# Altium PCB PCB1.PcbDoc (part 1 of 2)
Units mm, origin at the board's own origin, x right, y up, seen from the top; angles counter-clockwise.
Board outline 24 x 26.9 mm, 6 copper layers (Top Layer, Int1 (GND), Int2 (PWR), Int3 (Sign), Int4 (GND), Bottom Layer), stack 1.538 mm thick; 87 components, 95 nets, 449 pads, 224 vias.
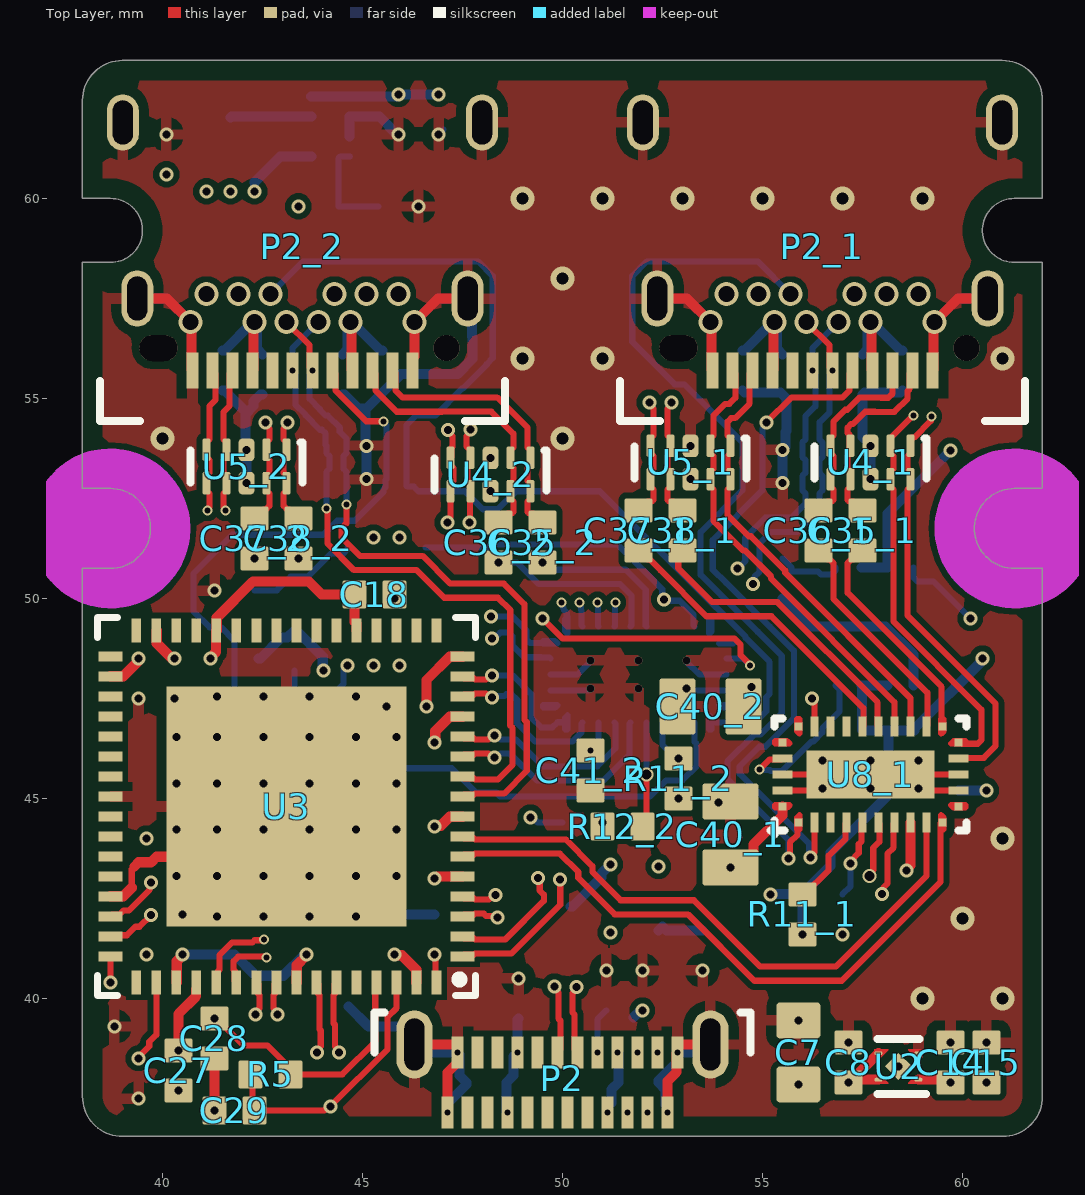
[diagram p0: Top Layer view]
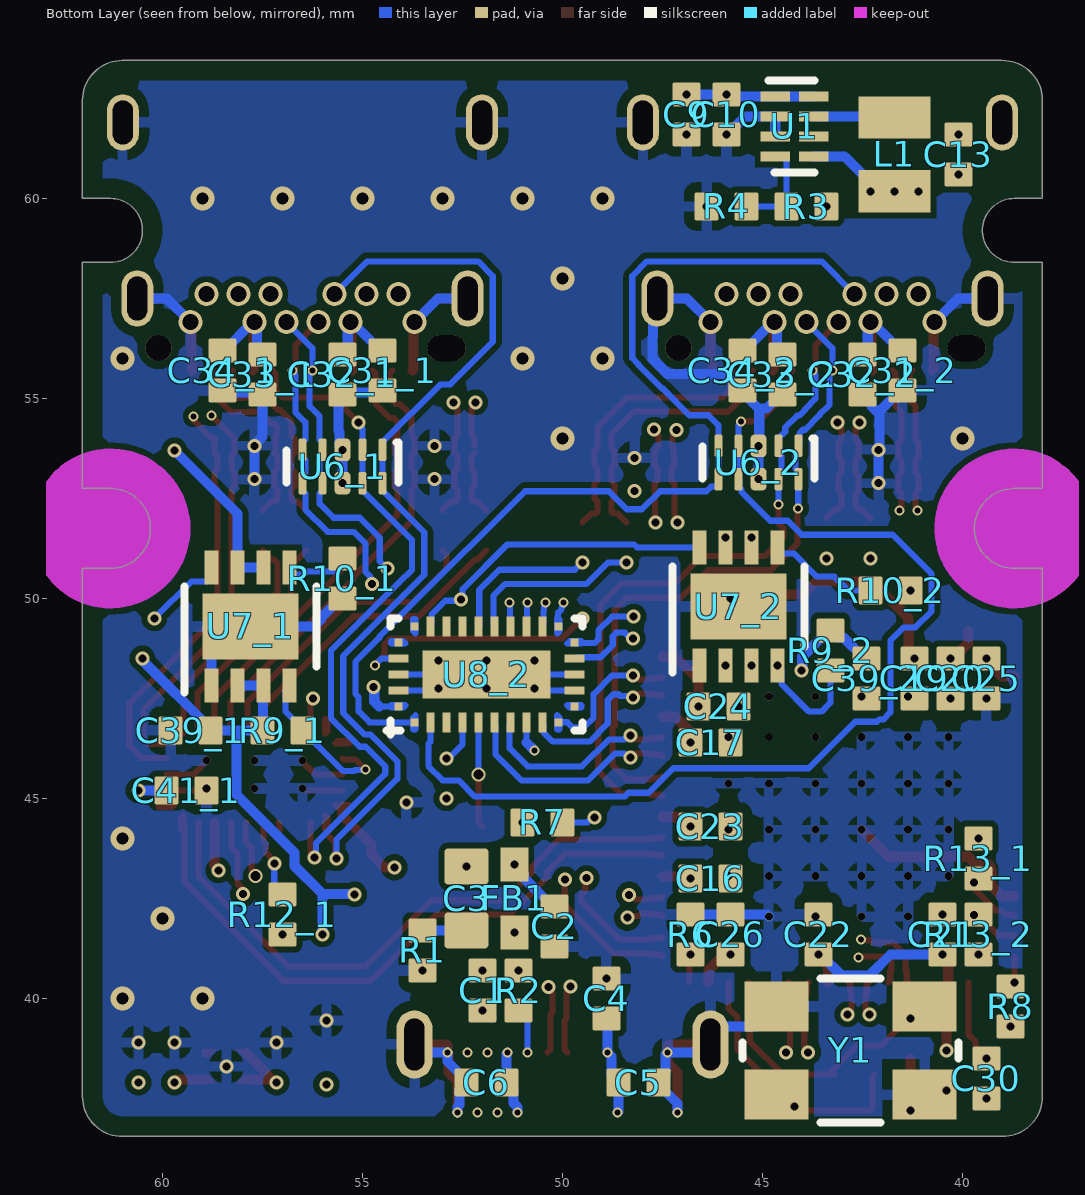
[diagram p1: Bottom Layer view, seen from below]
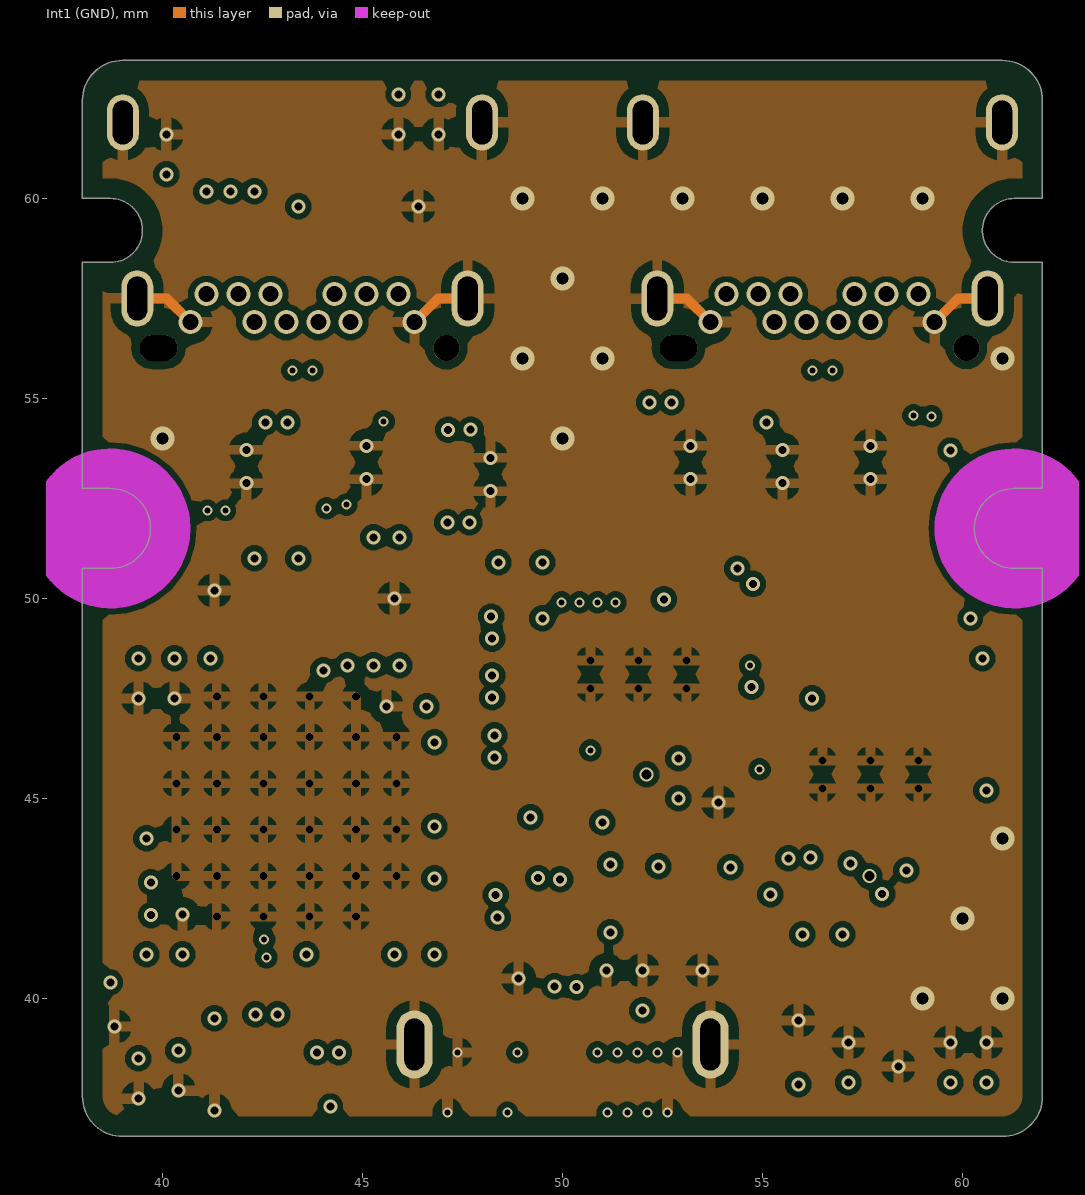
[diagram p2: Int1 (GND)]
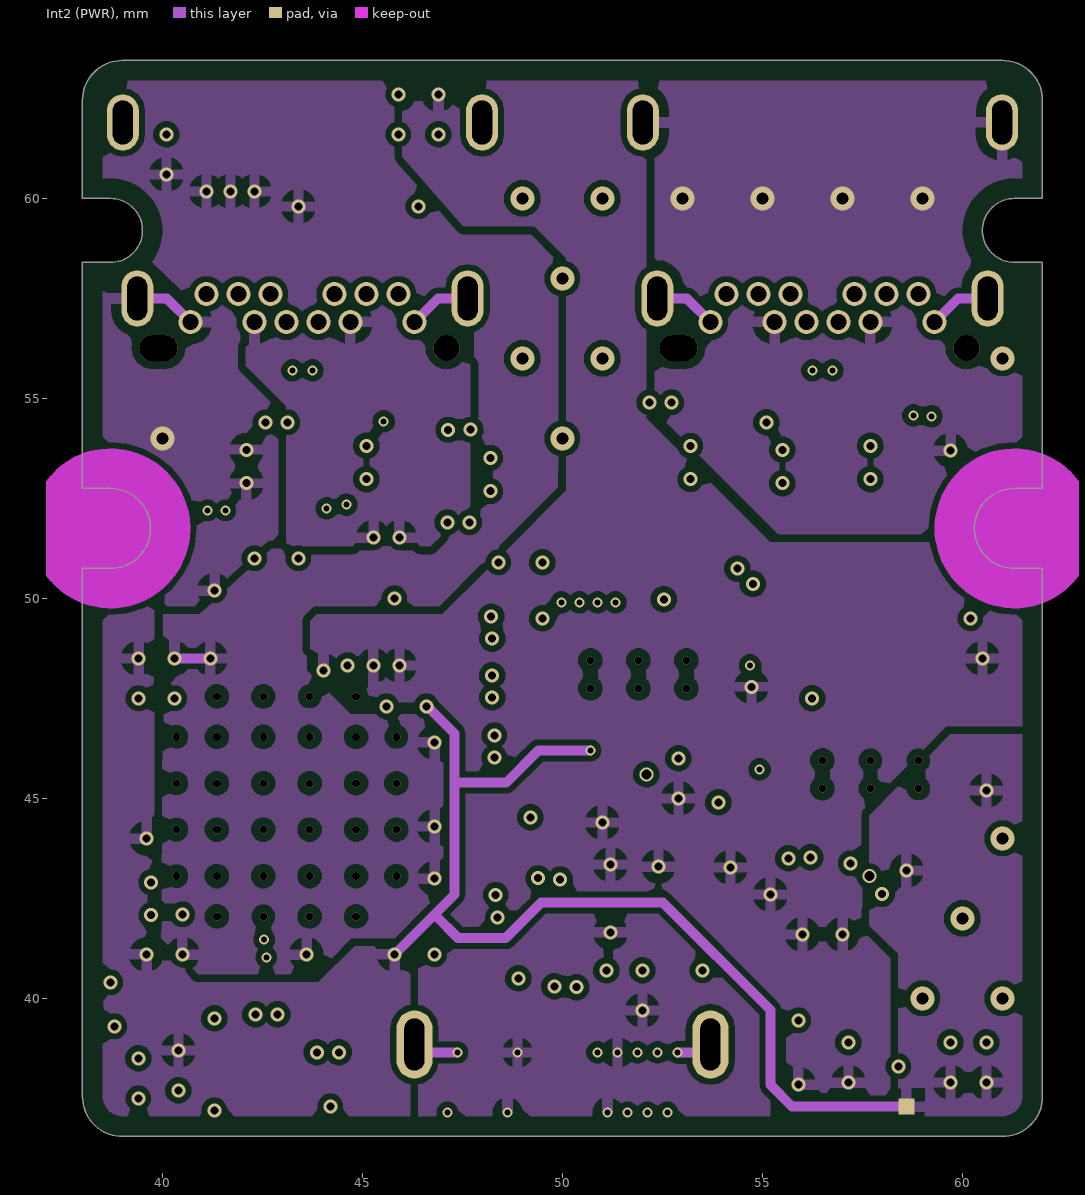
[diagram p3: Int2 (PWR)]
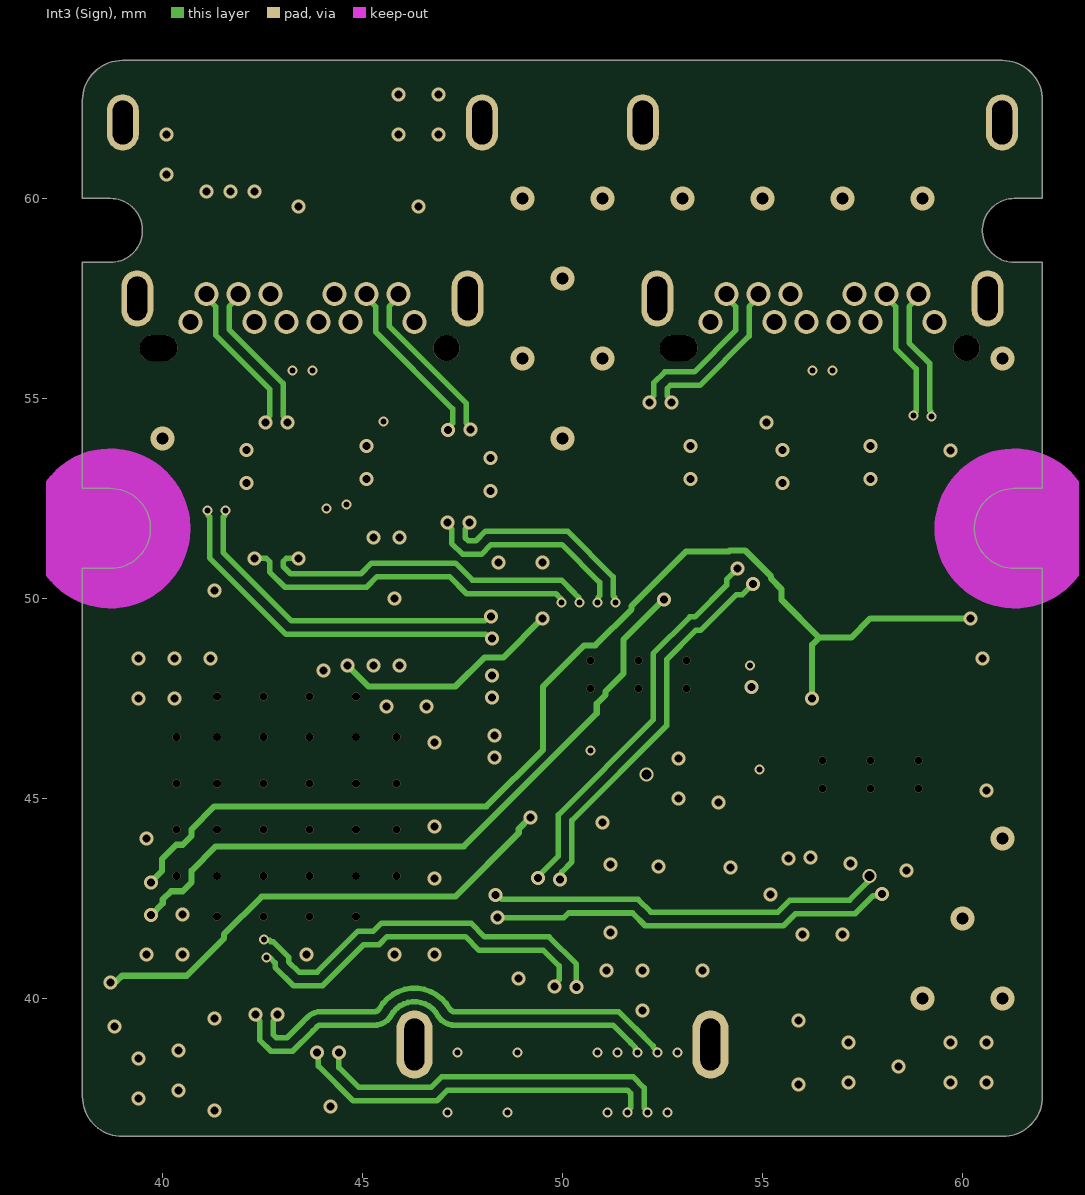
[diagram p4: Int3 (Sign)]
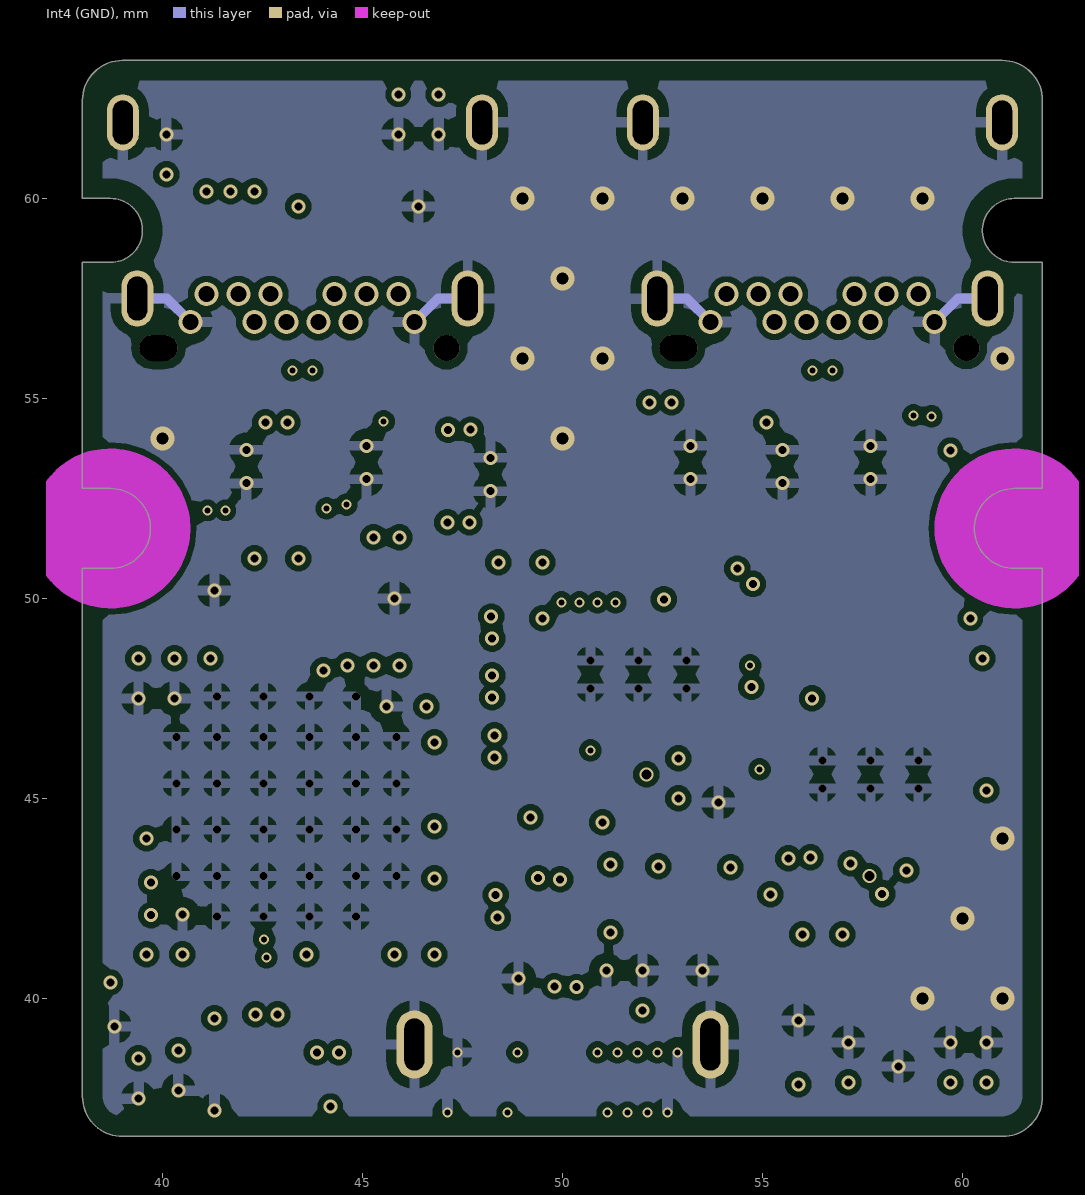
[diagram p5: Int4 (GND)]

## Layer stack, top to bottom
Top Solder: solder mask 0.0254, SM-001, Dk 4
Top Layer: signal copper 0.035
Dielectric 1: prepreg 0.0994, PP-006, Dk 4.1
Int1 (GND): signal copper 0.0152
Dielectric 3: core 0.55, Core-035, Dk 4.6
Int2 (PWR): signal copper 0.0152
Dielectric 5: prepreg 0.1088, PP-006, Dk 4.16
Int3 (Sign): signal copper 0.0152
Dielectric 6: core 0.55, Core-035, Dk 4.6
Int4 (GND): signal copper 0.0152
Dielectric 8: prepreg 0.0994, PP-006, Dk 4.1
Bottom Layer: signal copper 0.035
Bottom Solder: solder mask 0.0254, SM-001, Dk 4

## Board outline
38,50.75 38.7,50.75 ccw(c38.7,51.75) 38.7,52.75 38,52.75 38,58.4 38.7,58.4 ccw(c38.7,59.2) 38.7,60 38,60 38,62.45 cw(c39,62.45) 39,63.45 61,63.45 cw(c61,62.45) 62,62.45 62,60 61.3,60 ccw(c61.3,59.2) 61.3,58.4 62,58.4 62,52.75 61.3,52.75 ccw(c61.3,51.75) 61.3,50.75 62,50.75 62,37.55 cw(c61,37.55) 61,36.55 39,36.55 cw(c39,37.55) 38,37.55

## Design rules (kind name [scope] priority, off if disabled: settings)
BoardOutlineClearance [All] p1: gap=0.254 ignorepadtopadclearanceinfootprint=FALSE except(0: Arc-SplitContinuation Track-SplitContinuation SMDPad-SplitContinuation THPad-SplitContinuation Via-SplitContinuation Fill-SplitContinuation Poly-SplitContinuation Region-SplitContinuation Text-SplitContinuation; 0.2: Arc-OutlineEdge Track-OutlineEdge SMDPad-OutlineEdge THPad-OutlineEdge Via-OutlineEdge Text-OutlineEdge; 0.5: Fill-OutlineEdge Poly-OutlineEdge Region-OutlineEdge)
Clearance [All] p1: gap=0.15 ignorepadtopadclearanceinfootprint=FALSE except(0.2: Arc-Via Arc-Hole Track-Via Track-Hole SMDPad-THPad SMDPad-Via SMDPad-Hole THPad-Via THPad-Hole Via-Via Via-Hole Fill-Fill Fill-Poly Fill-Region Fill-Hole Poly-Poly Poly-Region Poly-Hole Region-Region Region-Hole Text-Hole; 0.254: Arc-Text Track-Text SMDPad-Text THPad-Text Via-Text Fill-Text Poly-Text Region-Text Text-Text)
DiffPairsRouting [All] p1: maxlimit=0.254 minlimit=0.2 mostfreqgap=0.254 toplayer_maxgap=0.2 toplayer_prefgap=0.2 toplayer_minwidth=0.155 toplayer_maxwidth=0.155 toplayer_prefwidth=0.155 midlayer2_maxgap=0.2 midlayer2_prefgap=0.2 midlayer2_minwidth=0.138 midlayer2_maxwidth=0.138 midlayer2_prefwidth=0.138 bottomlayer_maxgap=0.2 bottomlayer_prefgap=0.2 bottomlayer_minwidth=0.155 bottomlayer_maxwidth=0.155 bottomlayer_prefwidth=0.155 impedanceprofiledriven=TRUE impedanceprofileid={29971EB8-0806-4C52-B041-95433472F7FA} impedanceprofilevalue=90.000000 maxuncoupledlength=12.7
MatchedLengths [All] p1: tolerance=25.4 checknetsindiffpair=TRUE checkdiffpairvsdiffpair=FALSE checkxsignals=FALSE checkothers=FALSE usedelayunits=TRUE delaytolerance=8.000000
MinimumSolderMaskSliver [All] p1: minsoldermaskwidth=0.1
PolygonConnect [All] p1: connectstyle=Relief reliefconductorwidth=0.254 reliefentries=4 polygonreliefangle="90 Angle" airgapwidth=0.254
RoutingVias [All] p1: holewidth=0.2 width=0.35 viastyle="Through Hole" minholewidth=0.15 minwidth=0.25 maxholewidth=0.711 maxwidth=1.27
SilkToSolderMaskClearance [IsPad] p1: minsilkscreentomaskgap=0.15 clearancetoexposedcopper=TRUE
SolderMaskExpansion [All] p1: expansion=0.049 istentingtop=FALSE
SupplyNets "Schematic Supply Nets_9" [InNet('VBUS')] p1: voltage=0.000
SupplyNets "Schematic Supply Nets_7" [InNet('GND')] p2: voltage=0.000
SupplyNets "Schematic Supply Nets_6" [InNet('+5V')] p3: voltage=0.000
SupplyNets "Schematic Supply Nets_2" [InNet('+3.3V')] p4: voltage=0.000
SupplyNets "Schematic Supply Nets" [InNet('+1.1V')] p5: voltage=0.000
Width [All] p1: maxlimit=0.254 minlimit=0.1 preferedwidth=0.155
27 further rules are at their usual default settings.

## Classes and differential pairs
component class Downstream_Port_2: C31_2 C32_2 C33_2 C34_2 C35_2 C36_2 C37_2 C38_2 P2_2 U4_2 U5_2 U6_2
channel class Downstream_Controller: Downstream_Controller_1 Downstream_Controller_2
component class Downstream_Controller_1: C39_1 C40_1 C41_1 R9_1 R10_1 R11_1 R12_1 R13_1 U7_1 U8_1
component class Downstream_Controller_2: C39_2 C40_2 C41_2 R9_2 R10_2 R11_2 R12_2 R13_2 U7_2 U8_2
channel class Downstream_Port: Downstream_Port_1 Downstream_Port_2
component class USB_Hub: C16 C17 C18 C19 C20 C21 C22 C23 C24 C25 C26 C27 C28 C29 C30 R5 R6 R7 R8 U3 Y1
component class Upstream_Port: C1 C2 C3 C4 C5 C6 FB1 P2 R1 R2
component class Downstream_Port_1: C31_1 C32_1 C33_1 C34_1 C35_1 C36_1 C37_1 C38_1 P2_1 U4_1 U5_1 U6_1
component class Board_Power: C7 C8 C9 C10 C13 C14 C15 L1 R3 R4 U1 U2
differential pair SSTX1_2: +SSTX1_2_P -SSTX1_2_N
differential pair SSTX1_1: +SSTX1_1_P -SSTX1_1_N
differential pair SSTX2_2: +SSTX2_1_P -SSTX2_1_N
differential pair SSTX2_1: +SSTX2_2_P -SSTX2_2_N
differential pair SSTX_2: +SSTX_1_P -SSTX_1_N
differential pair SSTX_1: +SSTX_2_P -SSTX_2_N
differential pair SSRX_2: +SSRX_1_P -SSRX_1_N
differential pair SSRX_1: +SSRX_2_P -SSRX_2_N
differential pair CTX1: +CTX1_P -CTX1_N
differential pair CRX1: +CRX1_P -CRX1_N
differential pair CTX1_2: +CTX1_1_P -CTX1_1_N
differential pair CTX1_1: +CTX1_2_P -CTX1_2_N
differential pair CRX2_2: +CRX2_1_P -CRX2_1_N
differential pair CRX2_1: +CRX2_2_P -CRX2_2_N
differential pair D_2: +D_1_P -D_1_N
differential pair D_1: +D_2_P -D_2_N
differential pair D: +D_P -D_N
differential pair CTX2_2: +CTX2_1_P -CTX2_1_N
differential pair CTX2_1: +CTX2_2_P -CTX2_2_N
differential pair CRX1_2: +CRX1_1_P -CRX1_1_N
differential pair CRX1_1: +CRX1_2_P -CRX1_2_N

## Components (designator, comment, footprint, x,y, rotation, side; value= is the part's Value field where it differs from the comment)
C1 "CC0402KRX7R9BB103" CAP0402 52,40.2 r270 bottom value=10nF
C2 "GRM155R61H105KE05D" CAP0402 50.2,41.8 r90 bottom value=1µF
C3 "GRM188R61E475KE11D" CAP0603 52.4,42.5 r90 bottom value=4.7µF
C4 "CC0402KRX7R9BB103" CAP0402 48.9,40 r270 bottom value=10nF
C5 "CC0402KRX7R9BB103" CAP0402 48.1,37.9 r0 bottom value=10nF
C6 "CC0402KRX7R9BB103" CAP0402 51.9,37.9 r180 bottom value=10nF
C7 "GRT21BR61H475KE13L" CAP0603 55.9,38.65 r270 top value=4.7µF
C8 "CC0402KRX5R9BB104" CAP0402 57.15,38.4 r270 top value=0.1µF
C9 "GRM1555C1H221JA01D" CAP0402 46.9,62.1 r90 bottom value=10µF
C10 "CC0402KRX5R9BB104" CAP0402 45.9,62.1 r90 bottom value=0.1µF
C13 "CL05A106MQ5NUNC" CAP0402 40.1,61.1 r270 bottom value=10µF
C14 "CC0402KRX5R9BB104" CAP0402 59.7,38.4 r270 top value=0.1µF
C15 "CL05A106MQ5NUNC" CAP0402 60.6,38.4 r270 top value=10µF
C16 "CC0402KRX5R9BB104" CAP0402 46.3,43 r0 bottom value=0.1µF
C17 "CC0402KRX5R9BB104" CAP0402 46.3,46.4 r0 bottom value=0.1µF
C18 "CC0402KRX5R9BB104" CAP0402 45.3,50.1 r180 top value=0.1µF
C19 "CC0402KRX5R9BB104" CAP0402 41.2,48 r90 bottom value=0.1µF
C20 "CC0402KRX5R9BB104" CAP0402 40.3,48 r90 bottom value=0.1µF
C21 "CC0402KRX5R9BB104" CAP0402 40.5,41.6 r270 bottom value=0.1µF
C22 "CC0402KRX5R9BB104" CAP0402 43.6,41.6 r270 bottom value=0.1µF
C23 "CC0402KRX5R9BB104" CAP0402 46.3,44.3 r0 bottom value=0.1µF
C24 "CC0402KRX5R9BB104" CAP0402 46.1,47.3 r0 bottom value=0.1µF
C25 "CC0402KRX5R9BB104" CAP0402 39.4,48 r90 bottom value=0.1µF
C26 "CC0402KRX5R9BB104" CAP0402 45.8,41.6 r270 bottom value=0.1µF
C27 "CC0402KRX5R9BB104" CAP0402 40.4,38.2 r90 top value=0.1µF
C28 "GJM1555C1H180FB01D" CAP0402 41.3,39 r90 top value=18pF
C29 "GJM1555C1H180FB01D" CAP0402 41.8,37.2 r0 top value=18pF
C30 "GRM155R61H105KE05D" CAP0402 39.4,38 r90 bottom value=1µF
C31_1 "CC0402KRX7R9BB103" CAP0402 54.5,55.7 r90 bottom value=10nF (schematic designator C31)
C31_2 "CC0402KRX7R9BB103" CAP0402 41.5,55.7 r90 bottom value=10nF (schematic designator C31)
C32_1 "CC0402KRX7R9BB103" CAP0402 55.5,55.6 r90 bottom value=10nF (schematic designator C32)
C32_2 "CC0402KRX7R9BB103" CAP0402 42.5,55.6 r90 bottom value=10nF (schematic designator C32)
C33_1 "CC0402KRX7R9BB103" CAP0402 57.5,55.6 r90 bottom value=10nF (schematic designator C33)
C33_2 "CC0402KRX7R9BB103" CAP0402 44.5,55.6 r90 bottom value=10nF (schematic designator C33)
C34_1 "CC0402KRX7R9BB103" CAP0402 58.5,55.7 r90 bottom value=10nF (schematic designator C34)
C34_2 "CC0402KRX7R9BB103" CAP0402 45.5,55.7 r90 bottom value=10nF (schematic designator C34)
C35_1 "UMK105BJ224KV-F" CAP0402 57.5,51.7 r90 top value=0.22µF (schematic designator C35)
C35_2 "UMK105BJ224KV-F" CAP0402 49.5,51.4 r90 top value=0.22µF (schematic designator C35)
C36_1 "UMK105BJ224KV-F" CAP0402 56.4,51.7 r90 top value=0.22µF (schematic designator C36)
C36_2 "UMK105BJ224KV-F" CAP0402 48.4,51.4 r90 top value=0.22µF (schematic designator C36)
C37_1 "UMK105BJ224KV-F" CAP0402 51.9,51.7 r90 top value=0.22µF (schematic designator C37)
C37_2 "UMK105BJ224KV-F" CAP0402 42.3,51.5 r90 top value=0.22µF (schematic designator C37)
C38_1 "UMK105BJ224KV-F" CAP0402 53,51.7 r90 top value=0.22µF (schematic designator C38)
C38_2 "UMK105BJ224KV-F" CAP0402 43.4,51.5 r90 top value=0.22µF (schematic designator C38)
C39_1 "CC0402KRX5R9BB104" CAP0402 59.3,46.7 r180 bottom value=0.1µF (schematic designator C39)
C39_2 "CC0402KRX5R9BB104" CAP0402 42.4,48 r90 bottom value=0.1µF (schematic designator C39)
C40_1 "CL21A226MAYNNNE" CAP0805 54.2,44.1 r270 top value=22µF (schematic designator C40)
C40_2 "CL21A226MAYNNNE" CAP0805 53.7,47.3 r0 top value=22µF (schematic designator C40)
C41_1 "CC0402KRX5R9BB104" CAP0402 59.4,45.2 r0 bottom value=0.1µF (schematic designator C41)
C41_2 "CC0402KRX5R9BB104" CAP0402 50.7,45.7 r90 top value=0.1µF (schematic designator C41)
FB1 "BLM18SG260TN1D" BLM18SG260TN1D 51.2,42.5 r270 bottom value=26Ω
L1 "CIGT201610EHR47MNE" IND0806 41.7,61.1 r270 bottom value=0.47µH
P2 "USB4155-03-C" USB4155-03-C 50,36.55 r0 top (schematic designator P1)
P2_1 "USB4056-03-A" USB4056-03-A 56.5,63.45 r180 top (schematic designator P2)
P2_2 "USB4056-03-A" USB4056-03-A 43.5,63.45 r180 top (schematic designator P2)
R1 "ESR10EZPJ3R3" RES0402 53.5,41.2 r90 bottom value=3.3Ω
R2 "RC0402FR-075K1L" RES0402 51.1,40.2 r270 bottom value=5.1kΩ
R3 "RC0402FR-0790K9L" RES0402 43.9,59.8 r180 bottom value=240kΩ
R4 "ERJ-2RKF3002X" RES0402 45.9,59.8 r180 bottom value=200kΩ
R5 "RC0402FR-071ML" RES0402 42.7,38.1 r180 top value=1MΩ
R6 "CRCW04029K53FKED" RES0402 46.8,41.6 r270 bottom value=9.53kΩ
R7 "RC0402FR-0790K9L" RES0402 50.5,44.4 r0 bottom value=90.9kΩ
R8 "RC0402FR-0710KL" RES0402 38.8,39.8 r90 bottom value=10kΩ
R9_1 "ERJ-2RKF1003X" RES0402 57,46.7 r0 bottom value=100kΩ (schematic designator R9)
R9_2 "ERJ-2RKF1003X" RES0402 43.3,48.7 r90 bottom value=100kΩ (schematic designator R9)
R10_1 "ERJ-2RKF1003X" RES0402 55.5,50.5 r90 bottom value=100kΩ (schematic designator R10)
R10_2 "ERJ-2RKF1003X" RES0402 41.8,50.2 r0 bottom value=100kΩ (schematic designator R10)
R11_1 "ERJ-2RKF1003X" RES0402 56,42.1 r270 top value=100kΩ (schematic designator R11)
R11_2 "ERJ-2RKF1003X" RES0402 52.9,45.5 r270 top value=100kΩ (schematic designator R11)
R12_1 "RMCF0402FT887K" RES0402 57,42.1 r270 bottom value=887kΩ (schematic designator R12)
R12_2 "RMCF0402FT887K" RES0402 51.5,44.3 r180 top value=887kΩ (schematic designator R12)
R13_1 "ERJ-2RKF1003X" RES0402 39.6,43.5 r90 bottom value=100kΩ (schematic designator R13)
R13_2 "ERJ-2RKF1003X" RES0402 39.6,41.6 r270 bottom value=100kΩ (schematic designator R13)
U1 "TPS628302ARZER" WQFN-HR8_RZE_TEX 44.2,61.8 r180 bottom
U2 "TPS7A2033PDQNR" 4-X2SON 58.4,38.3 r180 top
U3 "TUSB8044AIRGCR" RGC0064G 43.1,44.8 r180 top
U4_1 "TPD4E05U06QDQARQ1" 10-UFDFN 57.7,53.4 r270 top (schematic designator U4)
U4_2 "TPD4E05U06QDQARQ1" 10-UFDFN 48.2,53.1 r270 top (schematic designator U4)
U5_1 "TPD4E05U06QDQARQ1" 10-UFDFN 53.2,53.4 r270 top (schematic designator U5)
U5_2 "TPD4E05U06QDQARQ1" 10-UFDFN 42.1,53.3 r270 top (schematic designator U5)
U6_1 "TPD4E05U06QDQARQ1" 10-UFDFN 55.5,53.3 r270 bottom (schematic designator U6)
U6_2 "TPD4E05U06QDQARQ1" 10-UFDFN 45.1,53.4 r270 bottom (schematic designator U6)
U7_1 "TPS2556" "8-SON (3x3)" 57.8,49.3 r90 bottom (schematic designator U7)
U7_2 "TPS2556" "8-SON (3x3)" 45.6,49.8 r90 bottom (schematic designator U7)
U8_1 "HD3SS3220IRNHT" "30-WFQFN Exposed Pad" 57.7,45.6 r90 top (schematic designator U8)
U8_2 "HD3SS3220IRNHT" "30-WFQFN Exposed Pad" 51.9,48.1 r90 bottom (schematic designator U8)
Y1 "ECS-240-20-30B-TR" ECS-240-20-30B-TR 42.8,38.7 r180 bottom value="24 MHz"

## Footprints (in the part's own frame and the unit in brackets; to place one, negate y for a bottom-side part, rotate by r counter-clockwise, add the part's x,y. Pads: shape width x height; smd on the part's side, far side on the other; paste and mask are expansions set on the pad)
4-X2SON [mm]
  oval 0.2x0.1 smd mask+0: 1(-0.5,0.33) 2(-0.5,-0.33) 3(0.5,-0.33) 4(0.5,0.33)
  rect 0.48x0.48 smd rot 135 paste-0.277: 5(0,0)
  Top Layer region: -0.61,-0.225 -0.61,-0.435 -0.25,-0.435 -0.25,-0.405 -0.43,-0.225
  Top Layer region: 0.61,0.225 0.61,0.435 0.25,0.435 0.25,0.405 0.43,0.225
  Top Layer region: 0.61,-0.225 0.61,-0.435 0.25,-0.435 0.25,-0.405 0.43,-0.225
  Top Layer region: -0.61,0.225 -0.61,0.435 -0.25,0.435 -0.25,0.405 -0.43,0.225
  silkscreen extent -0.69,-0.69 0.53,0.69, body extent -0.5,-0.5 0.5,0.5, height 0.34
"8-SON (3x3)" [mm] "8-VDFN Exposed Pad"
  rect 0.85x0.35 smd: 1(-1.475,0.975) 2(-1.475,0.325) 3(-1.475,-0.325) 4(-1.475,-0.975) 5(1.475,-0.975) 6(1.475,-0.325) 7(1.475,0.325) 8(1.475,0.975)
  rect 1.65x2.4 smd: 9(0,0)
  silkscreen extent -1.65,-1.65 1,1.65, body extent -1.5,-1.5 1.5,1.5, height 0.77
10-UFDFN [mm] "10-USON (2.5x1)"
  rrect50% 0.565x0.2 smd: 1(-0.417,1) 2(-0.417,0.5) 4(-0.417,-0.5) 5(-0.417,-1) 6(0.417,-1) 7(0.417,-0.5) 9(0.417,0.5) 10(0.417,1)
  rrect50% 0.565x0.4 smd: 3(-0.417,0) 8(0.417,0)
  silkscreen extent -0.6,-1.4 0.4,1.4, body extent -0.5,-1.25 0.5,1.25, height 0.55
"30-WFQFN Exposed Pad" [mm]
  rect 0.2x0.2 smd mask+0: 1(-1.2,1.8) 10(-1.2,-1.8) 11(-0.8,-2.2) 15(0.8,-2.2) 16(1.2,-1.8) 25(1.2,1.8) 26(0.8,2.2) 30(-0.8,2.2)
  rect 0.5x0.2 smd: 2(-1.2,1.4) 3(-1.2,1) 4(-1.2,0.6) 5(-1.2,0.2) 6(-1.2,-0.2) 7(-1.2,-0.6) 8(-1.2,-1) 9(-1.2,-1.4) 17(1.2,-1.4) 18(1.2,-1) 19(1.2,-0.6) 20(1.2,-0.2) 21(1.2,0.2) 22(1.2,0.6) 23(1.2,1) 24(1.2,1.4)
  rect 0.2x0.5 smd: 12(-0.4,-2.2) 13(0,-2.2) 14(0.4,-2.2) 27(0.4,2.2) 28(0,2.2) 29(-0.4,2.2)
  rect 1.2x3.2 smd: 31(0,0)
  Top Layer region: -1.027,1.885 -0.965,1.823 -0.95,1.788 -0.95,1.75 -1,1.7 -1.4,1.7 -1.45,1.75 -1.45,1.85 -1.4,1.9 -1.062,1.9
  Top Layer region: 0.7,-2 0.7,-2.4 0.75,-2.45 0.85,-2.45 0.9,-2.4 0.9,-2.062 0.885,-2.027 0.823,-1.965 0.823,-1.965 0.788,-1.95 0.75,-1.95 0.7,-2
  Top Layer region: -0.7,2 -0.7,2.4 -0.75,2.45 -0.85,2.45 -0.9,2.4 -0.9,2.062 -0.885,2.027 -0.823,1.965 -0.823,1.965 -0.788,1.95 -0.75,1.95 -0.7,2
  Top Layer region: 1.027,-1.885 0.965,-1.823 0.95,-1.788 0.95,-1.75 1,-1.7 1.4,-1.7 1.45,-1.75 1.45,-1.85 1.4,-1.9 1.062,-1.9
  Top Layer region: -0.7,-2 -0.7,-2.4 -0.75,-2.45 -0.85,-2.45 -0.9,-2.4 -0.9,-2.062 -0.885,-2.027 -0.823,-1.965 -0.823,-1.965 -0.788,-1.95 -0.75,-1.95 -0.7,-2
  Top Layer region: -1.027,-1.885 -0.965,-1.823 -0.95,-1.788 -0.95,-1.75 -1,-1.7 -1.4,-1.7 -1.45,-1.75 -1.45,-1.85 -1.4,-1.9 -1.062,-1.9
  Top Layer region: 1.027,1.885 0.965,1.823 0.95,1.788 0.95,1.75 1,1.7 1.4,1.7 1.45,1.75 1.45,1.85 1.4,1.9 1.062,1.9
  Top Layer region: 0.7,2 0.7,2.4 0.75,2.45 0.85,2.45 0.9,2.4 0.9,2.062 0.885,2.027 0.823,1.965 0.823,1.965 0.788,1.95 0.75,1.95 0.7,2
  silkscreen extent -1.5,-2.4 1.4,2.5, body extent -1.25,-2.25 1.25,2.25, height 0.8
BLM18SG260TN1D [mm]
  rect 0.85x0.7 smd: 1(-0.85,0) 2(0.85,0)
  body extent -0.88,-0.47 0.88,0.47, height 0.94
CAP0402 [mm] "Chip Capacitor, Body 1x0.5mm, Height 0.35mm, IPC Medium Density"
  rrect15% 0.6x0.7 smd: 1(-0.5,0) 2(0.5,0)
  body extent -0.53,-0.28 0.52,0.27, height 0.54
CAP0603 [mm]
  rrect20% 0.9x1.1 smd: 1(-0.8,0) 2(0.8,0)
  body extent -0.88,-0.48 0.87,0.47, height 0.87
CAP0805 [mm] "Chip Capacitor, Body 2.0x1.2mm, Height 0.45mm, IPC Medium Density"
  rrect15% 0.9x1.4 smd: 1(-0.825,0) 2(0.825,0)
  body extent -1.1,-0.73 1.1,0.72, height 1.39
ECS-240-20-30B-TR [mm]
  rect 1.6x1.25 smd: 1(-1.85,-1.1) 2(1.85,-1.1) 3(1.85,1.1) 4(-1.85,1.1)
  silkscreen extent -2.7,-1.8 2.7,1.8, body extent -2.5,-1.6 2.5,1.6, height 0.85
IND0806 [mil]
  rect 41.78x71 smd: 1(-36.39,0) 2(36.39,0)
  body extent -44,-36 44,36, height 39
RES0402 [mm] "Chip Resistor, Body 1x0.5mm, IPC Medium Density"
  rrect15% 0.6x0.7 smd: 1(-0.5,0) 2(0.5,0)
  body extent -0.5,-0.25 0.5,0.25, height 0.27
RGC0064G [mm]
  rect 0.6x0.24 smd: 1(-4.4,3.75) 2(-4.4,3.25) 3(-4.4,2.75) 4(-4.4,2.25) 5(-4.4,1.75) 6(-4.4,1.25) 7(-4.4,0.75) 8(-4.4,0.25) 9(-4.4,-0.25) 10(-4.4,-0.75) 11(-4.4,-1.25) 12(-4.4,-1.75) 13(-4.4,-2.25) 14(-4.4,-2.75) 15(-4.4,-3.25) 16(-4.4,-3.75) 33(4.4,-3.75) 34(4.4,-3.25) 35(4.4,-2.75) 36(4.4,-2.25) 37(4.4,-1.75) 38(4.4,-1.25) 39(4.4,-0.75) 40(4.4,-0.25) 41(4.4,0.25) 42(4.4,0.75) 43(4.4,1.25) 44(4.4,1.75) 45(4.4,2.25) 46(4.4,2.75) 47(4.4,3.25) 48(4.4,3.75)
  rect 0.24x0.6 smd: 17(-3.751,-4.4) 18(-3.251,-4.4) 19(-2.751,-4.4) 20(-2.251,-4.4) 21(-1.75,-4.4) 22(-1.25,-4.4) 23(-0.75,-4.4) 24(-0.25,-4.4) 25(0.25,-4.4) 26(0.75,-4.4) 27(1.25,-4.4) 28(1.75,-4.4) 29(2.251,-4.4) 30(2.751,-4.4) 31(3.251,-4.4) 32(3.751,-4.4) 49(3.751,4.4) 50(3.251,4.4) 51(2.751,4.4) 52(2.251,4.4) 53(1.75,4.4) 54(1.25,4.4) 55(0.75,4.4) 56(0.25,4.4) 57(-0.25,4.4) 58(-0.75,4.4) 59(-1.25,4.4) 60(-1.75,4.4) 61(-2.251,4.4) 62(-2.751,4.4) 63(-3.251,4.4) 64(-3.751,4.4)
  rect 6x6 smd: 65(0,0)
  silkscreen extent -4.72,-4.72 4.72,4.72, body extent -4.5,-4.5 4.5,4.5, height 0.97
USB4056-03-A [mm] "USB C 3.2 REC, HORZ, HYBRID PCB"
  oval 0.8x1.4 hole 0.5 slot 1.1 at 90 deg: 0(-4.49,1.55) 0(-4.13,5.95) 0(4.13,5.95) 0(4.49,1.55)
  rect 0.3x0.9 smd: A1(-2.75,7.75) A2(-2.25,7.75) A3(-1.75,7.75) A4(-1.25,7.75) A5(-0.75,7.75) A6(-0.25,7.75) A7(0.25,7.75) A8(0.75,7.75) A9(1.25,7.75) A10(1.75,7.75) A11(2.25,7.75) A12(2.75,7.75)
  round 0.6 hole 0.4: B1(2.8,6.54) B2(2.4,5.84) B3(1.6,5.84) B4(1.2,6.54) B5(0.8,5.84) B6(0.4,6.54) B7(-0.4,6.54) B8(-0.8,5.84) B9(-1.2,6.54) B10(-1.6,5.84) B11(-2.4,5.84) B12(-2.8,6.54)
  round 0.65 hole 0.65 mask+0: ""(-3.6,7.19)
  oval 0.95x0.65 hole 0.65 slot 0.95 at 0 deg mask+0: ""(3.6,7.19)
  silkscreen extent -5.07,8.02 5.06,9.02, body extent -4.92,-0.98 4.93,8.89, height 3.33
USB4155-03-C [mm] "USB TYPE C, PLUG, SMT , G/F, RIG"
  oval 0.9x1.7 hole 0.5 slot 1.3 at 90 deg: 0(-3.7,2.3) 0(3.7,2.3)
  rect 0.3x0.8 smd: A1(2.875,2.1) A2(2.375,2.1) A3(1.875,2.1) A4(1.375,2.1) A5(0.875,2.1) A6(0.375,2.1) A7(-0.125,2.1) A8(-0.625,2.1) A9(-1.125,2.1) A10(-1.625,2.1) A11(-2.125,2.1) A12(-2.625,2.1) B1(-2.875,0.6) B2(-2.375,0.6) B3(-1.875,0.6) B4(-1.375,0.6) B5(-0.875,0.6) B6(-0.375,0.6) B7(0.125,0.6) B8(0.625,0.6) B9(1.125,0.6) B10(1.625,0.6) B11(2.125,0.6) B12(2.625,0.6)
  silkscreen extent -4.7,2.1 4.7,3.1, body extent -4.4,-12.7 4.4,2.8, height 1.58
WQFN-HR8_RZE_TEX [mm]
  rect 0.732x0.255 smd: 1(-0.48,0.75) 2(-0.48,0.25) 3(-0.48,-0.25) 4(-0.48,-0.75) 5(0.48,-0.75) 6(0.48,-0.25) 7(0.48,0.25) 8(0.48,0.75)
  silkscreen extent -0.65,-1.15 0.5,1.15, body extent -0.5,-1 0.5,1, height 0.8

## Part data
C1 C4 C5 C6 C31_1 C31_2 C32_1 C32_2 C33_1 C33_2 C34_1 C34_2: "10000 pF ±10% 50V Ceramic Capacitor X7R 0402 (1005 Metric)", Package="0402 (1005 Metric)", Temperature Coefficient=X7R, Voltage=50V
C2 C30: "1 µF ±10% 50V Ceramic Capacitor X5R 0402 (1005 Metric)", Package="0402 (1005 Metric)", Temperature Coefficient=X5R, Voltage=50V
C3: "4.7 µF ±10% 25V Ceramic Capacitor X5R 0603 (1608 Metric)", Package="0603 (1608 Metric)", Temperature Coefficient=X5R, Voltage=25V
C7: library part GRM188R61E475KE11D, "4.7 µF ±10% 25V Ceramic Capacitor X5R 0603 (1608 Metric)", Package="0603 (1608 Metric)", Temperature Coefficient=X5R, Voltage=25V
C8 C10 C14 C16 C17 C18 C19 C20 C21 C22 C23 C24 C25 C26 C27 C39_1 C39_2 C41_1 C41_2: "0.1 µF ±10% 50V Ceramic Capacitor X5R 0402 (1005 Metric)", Package="0402 (1005 Metric)", Temperature Coefficient=X5R, Voltage=50V
C9: library part GRM155R61A106ME11D, "10 µF ±20% 10V Ceramic Capacitor X5R 0402 (1005 Metric)", Package="0402 (1005 Metric)", Temperature Coefficient=X5R, Voltage=10V
C13 C15: "10 µF ±20% 6.3V Ceramic Capacitor X5R 0402 (1005 Metric)", Package="0402 (1005 Metric)", Temperature Coefficient="C0G, NP0", Voltage=6.3V
C28 C29: "18 pF ±1% 50V Ceramic Capacitor C0G, NP0 0402 (1005 Metric)", Package="0402 (1005 Metric)", Temperature Coefficient="C0G, NP0", Voltage=50V
C35_1 C35_2 C36_1 C36_2 C37_1 C37_2 C38_1 C38_2: "0.22 µF ±10% 50V Ceramic Capacitor X5R 0402 (1005 Metric)", Package="0402 (1005 Metric)", Temperature Coefficient=X5R, Voltage=50V
C40_1 C40_2: "22 µF ±20% 25V Ceramic Capacitor X5R 0805 (2012 Metric)", Package="0805 (2012 Metric)", Temperature Coefficient=X5R, Voltage=25V
FB1: "26 Ohms @ 100 MHz 1 Power Line Ferrite Bead 0603 (1608 Metric) 6A 7mOhm", Current Rating=6A, Manufacturer 1="Murata Electronics", Supplier Part Number 1=490-3995-1-ND, Manufacturer Part Number 1=BLM18SG260TN1D, Supplier 1=Digi-Key
L1: "470 nH Shielded Thin Film Inductor 4.8 A 22mOhm Max 0806 (2016 Metric)", Current - Saturation (Isat)=5.9A, Current Rating=4.8A, Manufacturer 1="Samsung Electro-Mechanics", Supplier Part Number 1=1276-6902-1-ND, Manufacturer Part Number 1=CIGT201610EHR47MNE, Supplier 1=Digi-Key
P2: "USB-C (USB TYPE-C) USB 3.2 Gen 2 (USB 3.1 Gen 2, Superspeed + (USB 3.1)) Plug Connector 24 Position Board Edge, Surface Mount; Through Hole, Right Angle", Manufacturer=GCT, Manufacturer Product Number=USB4056-03-A, Operating Temperature="-25°C ~ 85°C", Supplier Part Number=2073-USB4056-03-ACT-ND, Voltage=48VDC, Datasheet=https://gct.co/connector/usb4056, Standards="USB 3.2 Gen 2", Supplier=DigiKey
P2_1 P2_2: "USB-C (USB TYPE-C) USB 3.2 Gen 2 (USB 3.1 Gen 2, Superspeed + (USB 3.1)) Receptacle Connector 24 Position Surface Mount, Right Angle; Through Hole", Manufacturer=GCT, Operating Temperature="-25°C ~ 85°C", Supplier Part Number=2073-USB4056-03-ACT-ND, Voltage=48VDC, Datasheet=https://gct.co/connector/usb4056, Manufacturer Product Number=USB4056-03-A, Standards="USB 3.2 Gen 2", Supplier=DigiKey
R1: "3.3 Ohms ±5% 0.5W, 1/2W Chip Resistor 0805 (2012 Metric) Automotive AEC-Q200, Pulse Withstanding Thick Film", Manufacturer 1="Rohm Semiconductor", Power Rating=1/2W, Supplier Part Number 1=RHM3.3KCT-ND, Manufacturer Part Number 1=ESR10EZPJ3R3, Supplier 1=Digi-Key
R2: "5.1 kOhms ±1% 0.063W, 1/16W Chip Resistor 0402 (1005 Metric) Moisture Resistant Thick Film", Manufacturer 1=YAGEO, Power Rating=1/16W, Supplier Part Number 1=311-5.10KLRCT-ND, Manufacturer Part Number 1=RC0402FR-075K1L, Supplier 1=Digi-Key
R3: library part RC0402FR-07240KL, "240 kOhms ±1% 0.063W, 1/16W Chip Resistor 0402 (1005 Metric) Moisture Resistant Thick Film", Manufacturer 1=YAGEO, Power Rating=1/16W, Supplier Part Number 1=311-240KLRCT-ND, Manufacturer Part Number 1=RC0402FR-07240KL, Supplier 1=Digi-Key
R4: library part ERJ-2RKF2003X, "200 kOhms ±1% 0.1W, 1/10W Chip Resistor 0402 (1005 Metric) Automotive AEC-Q200 Thick Film", Manufacturer 1="Panasonic Electronic Components", Power Rating=1/10W, Supplier Part Number 1=P200KLCT-ND, Manufacturer Part Number 1=ERJ-2RKF2003X, Supplier 1=Digi-Key
R5: "1 MOhms ±1% 0.063W, 1/16W Chip Resistor 0402 (1005 Metric) Moisture Resistant Thick Film", Manufacturer 1=YAGEO, Power Rating=1/16W, Supplier Part Number 1=311-1.00MLRCT-ND, Manufacturer Part Number 1=RC0402FR-071ML, Supplier 1=Digi-Key
R6: "9.53 kOhms ±1% 0.1W, 1/10W Chip Resistor 0402 (1005 Metric) Automotive AEC-Q200 Thick Film", Manufacturer 1="Vishay Dale", Power Rating=1/10W, Supplier Part Number 1=541-9.53KLCT-ND, Manufacturer Part Number 1=CRCW04029K53FKED, Supplier 1=Digi-Key
R7: "90.9 kOhms ±1% 0.063W, 1/16W Chip Resistor 0402 (1005 Metric) Moisture Resistant Thick Film", Manufacturer 1=YAGEO, Manufacturer Part Number 1=RC0402FR-0751KL, Power Rating=1/16W, Supplier Part Number 1=311-51.0KLRCT-ND, Supplier 1=Digi-Key
R8: "10 kOhms ±1% 0.063W, 1/16W Chip Resistor 0402 (1005 Metric) Moisture Resistant Thick Film", Manufacturer 1=YAGEO, Power Rating=1/16W, Supplier Part Number 1=311-10.0KLRCT-ND, Manufacturer Part Number 1=RC0402FR-0710KL, Supplier 1=Digi-Key
R9_1 R9_2 R10_1 R10_2 R11_1 R11_2 R13_1 R13_2: "100 kOhms ±1% 0.1W, 1/10W Chip Resistor 0402 (1005 Metric) Automotive AEC-Q200 Thick Film", Manufacturer 1="Panasonic Electronic Components", Power Rating=1/10W, Supplier Part Number 1=P100KLCT-ND, Manufacturer Part Number 1=ERJ-2RKF1003X, Supplier 1=Digi-Key
R12_1 R12_2: "887 kOhms ±1% 0.063W, 1/16W Chip Resistor 0402 (1005 Metric) Automotive AEC-Q200 Thick Film", Manufacturer 1="Stackpole Electronics Inc", Power Rating=1/16W, Supplier Part Number 1=RMCF0402FT887KCT-ND, Manufacturer Part Number 1=RMCF0402FT887K, Supplier 1=Digi-Key
U1: "Buck Switching Regulator IC Positive Adjustable 0.5V 1 Output 2A 8-WFDFN", Manufacturer="Texas Instruments", Operating Temperature="-40°C ~ 125°C", Supplier Part Number=296-TPS628302ARZERCT-ND, Datasheet=https://www.ti.com/lit/ds/symlink/tps628302.pdf?ts=1772906536972&ref_url=https%253A%252F%252Fwww.ti.com%252Fproduct%252FTPS628302, Manufacturer Product Number=TPS628302ARZER, Supplier=DigiKey
U2: "Linear Voltage Regulator IC Positive Fixed 1 Output 300mA 4-X2SON (1x1)", Manufacturer="Texas Instruments", Operating Temperature="-40°C ~ 125°C", Supplier Part Number=296-TPS7A2033PDQNRCT-ND, Datasheet=https://www.ti.com/lit/ds/symlink/tps7a20.pdf?HQS=dis-dk-null-digikeymode-dsf-pf-null-wwe&ts=1772479101747, Manufacturer Product Number=TPS7A2033PDQNR, Supplier=DigiKey
U3: "Four-port USB 3.2 x1 Gen1 hub with USB billboard 64-VQFN -40 to 85", Manufacturer_Name="Texas Instruments", Copyright="Copyright (C) 2026 Ultra Librarian. All rights reserved.", Datasheet=https://www.ti.com/lit/gpn/tusb8044a, Manufacturer_Part_Number=TUSB8044AIRGCR, RefDes=RefDes, TYPE=TYPE
U4_1 U4_2 U5_1 U5_2 U6_1 U6_2: "14V Clamp 2.5A (8/20µs) Ipp Tvs Diode Surface Mount 10-USON (2.5x1)", Manufacturer="Texas Instruments", Operating Temperature="-40°C ~ 125°C", Supplier Part Number=296-40696-1-ND, Datasheet=https://www.ti.com/lit/ds/symlink/tpd4e05u06-q1.pdf?HQS=dis-dk-null-digikeymode-dsf-pf-null-wwe&ts=1772378762932&ref_url=https%253A%252F%252Fwww.ti.com%252Fgeneral%252Fdocs%252Fsuppproductinfo.tsp%253FdistId%253D10%2526gotoUrl%253Dhttps%253A%252F%252Fwww.ti.com%252Flit%252Fgpn%252Ftpd4e05u06-q1, Manufacturer Product Number=TPD4E05U06QDQARQ1, Supplier=DigiKey
U7_1 U7_2: "Power Switch/Driver 1:1 N-Channel 5A 8-SON (3x3)", Manufacturer="Texas Instruments", Manufacturer Product Number=TPS2556DRBR, Operating Temperature="-40°C ~ 125°C", Supplier Part Number=296-39382-1-ND, Datasheet=https://www.ti.com/lit/ds/symlink/tps2557.pdf?ts=1772363913218, Supplier=DigiKey
U8_1 U8_2: "USB, Type-C Controller PMIC 30-WQFN (4.5x2.5)", Manufacturer="Texas Instruments", Operating Temperature="-40°C ~ 85°C", Supplier Part Number=296-43694-1-ND, Datasheet=https://www.ti.com/lit/ds/symlink/hd3ss3220.pdf?HQS=dis-dk-null-digikeymode-dsf-pf-null-wwe&ts=1772376564629&ref_url=https%253A%252F%252Fwww.ti.com%252Fgeneral%252Fdocs%252Fsuppproductinfo.tsp%253FdistId%253D10%2526gotoUrl%253Dhttps%253A%252F%252Fwww.ti.com%252Flit%252Fgpn%252Fhd3ss3220, Manufacturer Product Number=HD3SS3220IRNHT, Supplier=DigiKey
Y1: "24 MHz ±30ppm Crystal 20pF 30 Ohms 4-SMD, No Lead", ESR (Equivalent Series Resistance)=30Ω, Load Capacitance=20pF, Manufacturer 1="ECS Inc.", Supplier Part Number 1=XC1122CT-ND, Manufacturer Part Number 1=ECS-240-20-30B-TR, Supplier 1=Digi-Key

## Free pads (board coordinates)
  rect 0.4x0.4 on Mid1: ""(58.6,37.3)

## Via types
v1: diameter 0.35, hole 0.2, Top Layer to Bottom Layer, 129 vias
v2: diameter 0.2, hole 0.2, Top Layer to Bottom Layer, 44 vias
v3: diameter 0.25, hole 0.15, Top Layer to Bottom Layer, 33 vias
v4: diameter 0.6, hole 0.3, Top Layer to Bottom Layer, 16 vias
v5: diameter 0.35, hole 0.25, Top Layer to Bottom Layer, 2 vias

## Nets (pads, with @x,y where several pads share a name; then routed paths per layer and width w, separated by ;. In a path a pad name is that pad's centre, name@x,y a point inside that pad or via, vN(x,y) a via of type N, cw(c..) or ccw(c..) an arc to the next point about the centre after c; other vN are vias at no path point)
+1.1V: C13.2 C16.2 C17.2 C18.2 C19.2 C20.2 C21.2 C22.2 C23.2 L1.2 R3.2 U1.5 U3.5 U3.8 U3.13 U3.21 U3.28 U3.31 U3.51 U3.57 | length 17.2
  Top Layer w0.254: U3.31@39.849,49.2 39.856,49.193 39.856,48.881 40.219,48.518 40.282,48.518 v1(40.3,48.5) ; U3.51@40.349,40.4 40.356,40.407 40.356,40.93 40.5,41.074 v1(40.5,41.1) ; v1(41.2,48.5) 41.2,48.526 41.343,48.669 41.343,49.193 41.357,49.207 41.357,49.519 42.261,50.423 43.659,50.423 43.982,50.1 C18.2@44.8,50.1 44.8,49.416 44.85,49.366 U3.21@44.85,49.2 ; U3.57@43.35,40.4 43.357,40.407 43.357,40.831 43.6,41.074 v1(43.6,41.1) ; v1(46.8,43) 46.826,43 46.876,43.05 U3.5@47.5,43.05 ; v1(46.8,44.3) 46.818,44.318 46.957,44.318 47.181,44.543 47.493,44.543 U3.8@47.5,44.55 ; v1(46.8,46.4) 46.818,46.418 46.818,46.68 47.181,47.043 47.493,47.043 U3.13@47.5,47.05
  Int2 (PWR) w0.254: v1(40.3,48.5) v1(41.2,48.5)
  Bottom Layer w0.254: v1(40.5,41.1) 41.8,41.1 42.331,40.569 43.019,40.569 43.55,41.1 v1(43.6,41.1) ; L1.2@42.3,60.4 42.3,60.405 42.945,61.05 U1.5@43.72,61.05
  other v1: 43.4,59.8 41.1,60.176 41.7,60.176 42.3,60.176 40.1,60.6
+3.3V: C14.2 C15.2 C24.2 C25.2 C26.2 C27.2 C41_1.2 C41_2.2 pad. R13_1.2 R13_2.2 U2.1 U3.16 U3.34 U3.52 U3.63 U8_1.8 U8_2.8 | length 35.5
  Top Layer w0.254: U3.34@38.7,48.05 38.707,48.057 39.019,48.057 39.382,48.42 39.382,48.482 v1(39.4,48.5) ; v1(40.4,38.7) 40.4,39.615 40.842,40.058 U3.52@40.842,40.227 ; v1(45.8,41.1) 45.818,41.082 45.981,41.082 46.344,40.719 46.344,40.407 U3.63@46.351,40.4 ; v1(46.6,47.3) 46.6,47.962 47.181,48.543 47.493,48.543 U3.16@47.5,48.55 ; v1(58.6,43.2) 58.6,43.226 58.7,43.326 U8_1.8@58.7,44.4 ; U2.1@58.9,37.97 59.63,37.97 v1(59.7,37.9)
  Int2 (PWR) w0.254: v1(45.8,41.1) 46.8,42.1 ; v1(46.6,47.3) 46.626,47.3 47.302,46.624 47.302,45.4 ; v3(50.7,46.202) 49.402,46.202 48.6,45.4 47.302,45.4 ; pad.@58.6,37.3 55.74,37.3 55.2,37.84 55.2,39.71 52.51,42.4 49.469,42.4 48.578,41.509 47.391,41.509 46.8,42.1 ; 46.8,42.1 47.3,42.6 47.3,42.602 47.302,42.604 47.302,45.4
  Bottom Layer w0.155: 50.9,46.4 U8_2.8@50.9,46.9
  Bottom Layer w0.254: v3(50.7,46.202) 50.702,46.202 50.9,46.4 ; C41_1.2@59.9,45.2 v1(60.6,45.2)
  other v1: 60.6,37.9 39.6,41.1 39.6,44
+5V: C2.2 C3.2 C7.2 C8.2 C9.2 C10.2 C39_1.2 C39_2.2 C40_1.2 C40_2.2 FB1.1 R7.2 R9_1.2 R9_2.2 R11_1.2 R11_2.2 R12_1.2 R12_2.2 U1.1 U1.8 U2.3 U2.4 U7_1.2 U7_1.3 U7_2.2 U7_2.3 U8_1.30 U8_2.30 | length 24.6
  Top Layer w0.254: v1(54.2,43.275) 54.45,43.275 54.773,43.598 54.773,43.848 55.5,44.575 U8_1.30@55.5,44.8 ; U2.4@57.9,37.97 57.22,37.97 v1(57.15,37.9) 57.2,37.9 57.419,38.119 57.419,38.149 U2.3@57.9,38.63
  Bottom Layer w0.155: U8_2.30@54.1,47.3 54.524,47.3
  Bottom Layer w0.254: C39_2.2@42.4,48.5 42.45,48.5 42.977,49.027 43.127,49.027 R9_2.2@43.3,49.2 43.35,49.2 44.007,48.543 44.007,48.218 v1(44.025,48.2) ; U1.8@43.72,62.55 U1.1@44.68,62.55 ; U1.1@44.68,62.55 45.85,62.55 v1(45.9,62.6) v1(46.9,62.6) ; C2.2@50.2,42.3 50.25,42.3 50.977,43.027 50.977,43.127 v1(51.2,43.35) ; 54.581,47.3 54.707,47.426 54.707,47.772 v1(54.725,47.79) ; v1(55.2,42.6) 55.215,42.615 56,42.615 ; v1(56,41.6) 56,42.615 ; U7_1.2@58.125,47.825 U7_1.3@57.475,47.825 57.487,47.813 57.487,46.712 R9_1.2@57.5,46.7 58.15,46.7 ; v1(60.5,48.5) 60.482,48.482 60.482,48.432 58.8,46.75 C39_1.2@58.8,46.7 58.15,46.7 ; 56,42.615 56.702,43.317 56.702,43.648 58.15,45.096 58.15,46.7
  other v1: 55.9,37.85 57,41.6 52.4,43.3 51,44.4 52.9,45 45.275,48.325 45.925,48.325
CC1: P2.A5 R2.2 | length 1.1
  Bottom Layer w0.155: v3(50.875,38.65) 50.875,39.477 51.098,39.7 R2.2@51.1,39.7
CC1_1: P2_1.A5 U6_1.2 U6_1.9 U8_1.2 | length 17.5
  Top Layer w0.155: v1(55.1,54.4) 55.723,55.023 56.994,55.023 57.177,55.206 57.177,55.627 P2_1.A5@57.25,55.7 ; v1(56.2,43.525) 56.2,43.553 56.3,43.653 U8_1.2@56.3,44.4
  Bottom Layer w0.155: v1(55.1,54.4) 55.1,54.347 55,54.247 U6_1.2@55,53.717 U6_1.9@55,52.883 55,52.7 53.759,51.459 53.759,50.719 54.091,50.387 54.097,50.387 55.187,49.297 55.187,49.291 55.787,48.691 55.787,47.36 55.787,47.008 55.069,46.291 54.921,46.291 54.43,45.799 54.43,45.615 56.163,43.882 56.163,43.563 v1(56.2,43.525)
CC1_2: P2_2.A5 U6_2.4 U6_2.7 U8_2.2 | length 27.4
  Top Layer w0.155: P2_2.A5@44.25,55.7 44.322,55.627 44.322,55.206 45.096,54.432 45.526,54.432 v3(45.531,54.427)
  Bottom Layer w0.155: v3(45.531,54.427) 45.531,54.401 45.6,54.333 U6_2.4@45.6,53.817 ; U6_2.4@45.6,53.817 U6_2.7@45.6,52.983 45.578,52.96 45.578,52.777 45.527,52.727 45.527,52.664 44.808,51.944 44.369,51.944 44.015,51.591 41.746,51.591 40.773,50.618 40.773,49.682 41.18,49.275 41.47,49.275 41.8,48.945 41.8,47.155 41.982,46.973 42.082,46.973 42.137,46.917 42.683,46.917 43.843,45.757 47.23,45.757 47.847,45.141 48.351,45.141 48.444,45.047 52.187,45.047 52.592,45.453 52.997,45.453 53.353,45.808 53.353,46.365 53.3,46.417 U8_2.2@53.3,46.9
CC2_1: P2_1.B5 U6_1.1 U6_1.10 U8_1.1 | length 23.9
  Top Layer w0.155: v1(55.65,43.5) 55.687,43.537 55.687,43.9 55.877,44.089 55.877,44.377 U8_1.1@55.9,44.4
  Bottom Layer w0.155: v1(55.65,43.5) 55.65,43.964 54.126,45.489 54.126,45.926 54.795,46.595 54.943,46.595 55.482,47.134 55.482,47.486 55.482,48.564 54.882,49.164 54.882,49.17 53.97,50.082 53.964,50.082 53.454,50.593 53.454,51.654 54.5,52.7 U6_1.10@54.5,52.883 54.5,53.9 53.048,55.352 52.806,55.352 51.743,56.416 51.743,58.06 52.11,58.427 54.883,58.427 P2_1.B5@55.7,57.61
CC2_2: P2_2.B5 U6_2.5 U6_2.6 U8_2.1 | length 26.5
  Bottom Layer w0.155: P2_2.B5@42.7,57.61 43.517,58.428 47.89,58.428 48.258,58.06 48.258,56.012 48.107,55.861 48.107,55.843 47.517,55.253 47.499,55.253 46.828,54.582 46.35,54.582 46.1,54.333 U6_2.5@46.1,53.817 46.1,52.819 46.122,52.796 46.286,52.796 46.4,52.683 47.56,52.683 48.013,52.23 48.387,52.23 48.84,52.683 50.933,52.683 53.838,49.778 53.844,49.778 54.578,49.044 54.578,49.013 55.178,48.413 55.178,47.613 55.096,47.531 55.096,47.179 54.817,46.9 U8_2.1@53.7,46.9
CRX1_1_N: P2_1.B10 U4_1.2 U4_1.9 U8_1.15 | length 13.3
  Top Layer w0.155: v3(58.774,54.575) 58.2,54 U4_1.2@58.2,53.817 58.2,53.635 58.273,53.562 58.273,53.238 58.2,53.165 U4_1.9@58.2,52.983 58.2,52.8 58.273,52.727 58.273,49.426 60.475,47.224 60.475,46.46 60.384,46.369 59.976,46.369 59.945,46.4 U8_1.15@59.9,46.4
  Int3 (Sign) w0.138: P2_1.B10@58.1,57.61 58.1,57.529 58.331,57.298 58.331,56.249 58.839,55.741 58.839,54.67 58.774,54.605 v3(58.774,54.575)
CRX1_1_P: P2_1.B11 U4_1.1 U4_1.10 U8_1.14 | length 13.9
  Top Layer w0.155: v3(59.224,54.554) 59.206,54.536 59.206,54.437 58.791,54.023 58.723,54.023 58.7,54 U4_1.1@58.7,53.817 58.7,53.635 58.627,53.562 58.627,53.238 58.7,53.165 U4_1.10@58.7,52.983 58.7,52.8 58.627,52.727 58.627,49.573 60.829,47.371 60.829,46.313 60.531,46.015 59.915,46.015 U8_1.14@59.9,46
  Int3 (Sign) w0.138: P2_1.B11@58.9,57.61 58.9,57.529 58.669,57.298 58.669,56.389 59.177,55.881 59.177,54.709 59.202,54.683 59.202,54.575 v3(59.224,54.554)
CRX1_2_N: P2_2.B10 U4_2.5 U4_2.6 U8_2.18 | length 12.8
  Top Layer w0.155: v1(47.125,51.9) 47.125,51.953 47.2,52.028 U4_2.6@47.2,52.683 47.2,52.865 47.273,52.938 47.273,53.262 47.2,53.335 U4_2.5@47.2,53.518 47.223,53.54 47.223,53.768 47.248,53.793 47.248,54.059 47.144,54.163 v1(47.144,54.216)
  Int3 (Sign) w0.138: P2_2.B10@45.1,57.61 45.1,57.529 45.331,57.298 45.331,56.667 47.256,54.742 47.256,54.385 47.144,54.273 v1(47.144,54.216) ; v1(47.125,51.9) 47.125,51.843 47.231,51.737 47.231,51.378 47.51,51.1 47.972,51.1 48.216,51.344 49.988,51.344 50.931,50.401 50.931,50.063 50.896,50.029 50.896,49.921 v3(50.875,49.9)
  Bottom Layer w0.155: v3(50.875,49.9) 50.888,49.888 50.888,49.312 U8_2.18@50.9,49.3
CRX1_2_P: P2_2.B11 U4_2.4 U4_2.7 U8_2.19 | length 12.8
  Top Layer w0.155: v1(47.675,51.9) 47.687,51.913 47.687,52.67 U4_2.7@47.7,52.683 47.7,52.865 47.627,52.938 47.627,53.262 47.7,53.335 U4_2.4@47.7,53.518 47.7,53.7 47.602,53.798 47.602,54.064 47.706,54.168 v1(47.706,54.22)
  Int3 (Sign) w0.138: P2_2.B11@45.9,57.61 45.9,57.529 45.669,57.298 45.669,56.807 47.594,54.882 47.594,54.39 47.706,54.278 v1(47.706,54.22) ; v1(47.675,51.9) 47.675,51.843 47.569,51.737 47.569,51.518 47.65,51.437 47.832,51.437 48.076,51.682 50.128,51.682 51.269,50.541 51.269,50.063 51.304,50.029 51.304,49.921 v3(51.325,49.9)
  Bottom Layer w0.155: U8_2.19@51.3,49.3 51.313,49.312 51.313,49.887 v3(51.325,49.9)
CRX1_N: P2.B10 U3.58 | length 11
  Top Layer w0.155: U3.58@43.85,40.4 43.893,40.357 43.893,40.117 43.923,40.087 43.923,39.229 43.956,39.196 43.956,38.805 43.858,38.707 v1(43.858,38.654)
  Int3 (Sign) w0.138: v1(43.858,38.654) 43.899,38.613 43.899,38.309 44.764,37.443 46.861,37.443 47.125,37.707 51.625,37.707 51.706,37.626 51.706,37.261 51.625,37.18 v3(51.625,37.15)
CRX1_P: P2.B11 U3.59 | length 10.9
  Top Layer w0.155: U3.59@44.35,40.4 44.308,40.357 44.308,40.117 44.278,40.087 44.278,39.376 44.311,39.343 44.311,38.805 44.408,38.707 v1(44.408,38.654)
  Int3 (Sign) w0.138: v1(44.408,38.654) 44.413,38.649 44.413,38.272 44.904,37.781 46.721,37.781 46.985,38.045 51.765,38.045 52.044,37.766 52.044,37.261 52.125,37.18 v3(52.125,37.15)
CRX2_1_N: P2_1.A10 U5_1.1 U5_1.10 U8_1.18 | length 11.3
  Top Layer w0.155: P2_1.A10@54.75,55.7 54.677,55.627 54.677,54.871 54.316,54.51 54.218,54.51 54.127,54.42 54.127,54.073 54.2,54 54.2,53.635 54.127,53.562 54.127,53.238 54.2,53.165 U5_1.10@54.2,52.983 54.2,52.8 54.127,52.727 54.127,52.084 54.657,51.555 54.71,51.555 55.569,50.696 55.569,50.643 58.7,47.512 U8_1.18@58.7,46.8